# Altium PCB M2_NEO-M9N_MODULE.PcbDoc
Units mil, origin at the board's own origin, x right, y up, seen from the top; angles counter-clockwise.
Board outline 866.14 x 1653.54 mil, 4 copper layers (L01-Top Layer, L02-Inner Layer, L03-Inner Layer, L04-Bottom Layer), stack 29.565 mil thick; 40 components, 31 nets, 161 pads, 305 vias.
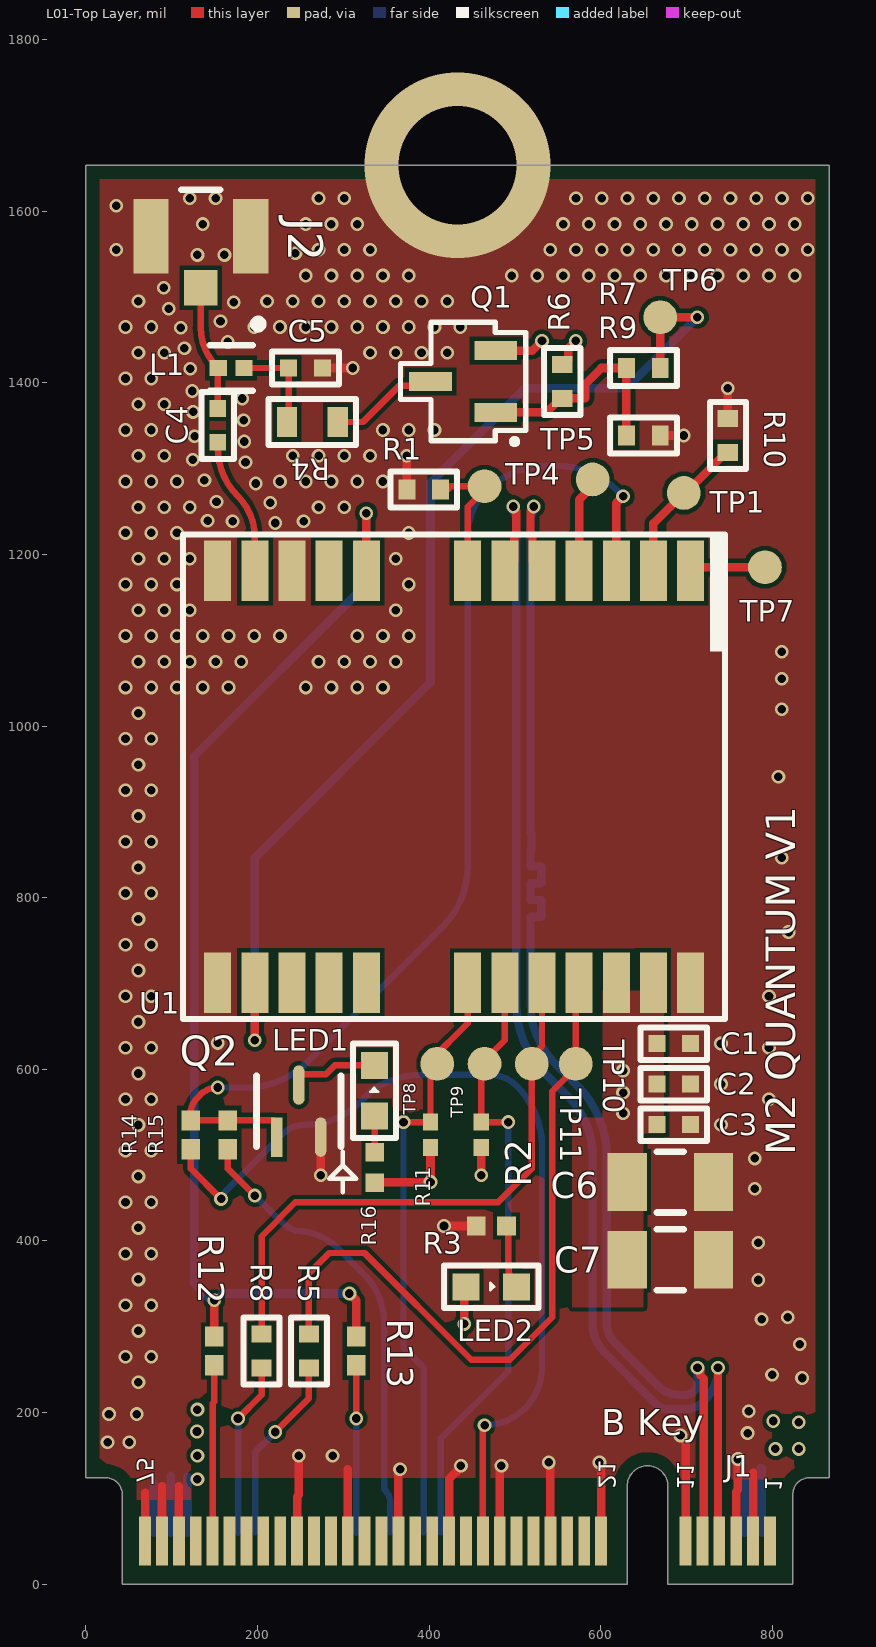
[diagram p0: L01-Top Layer view]
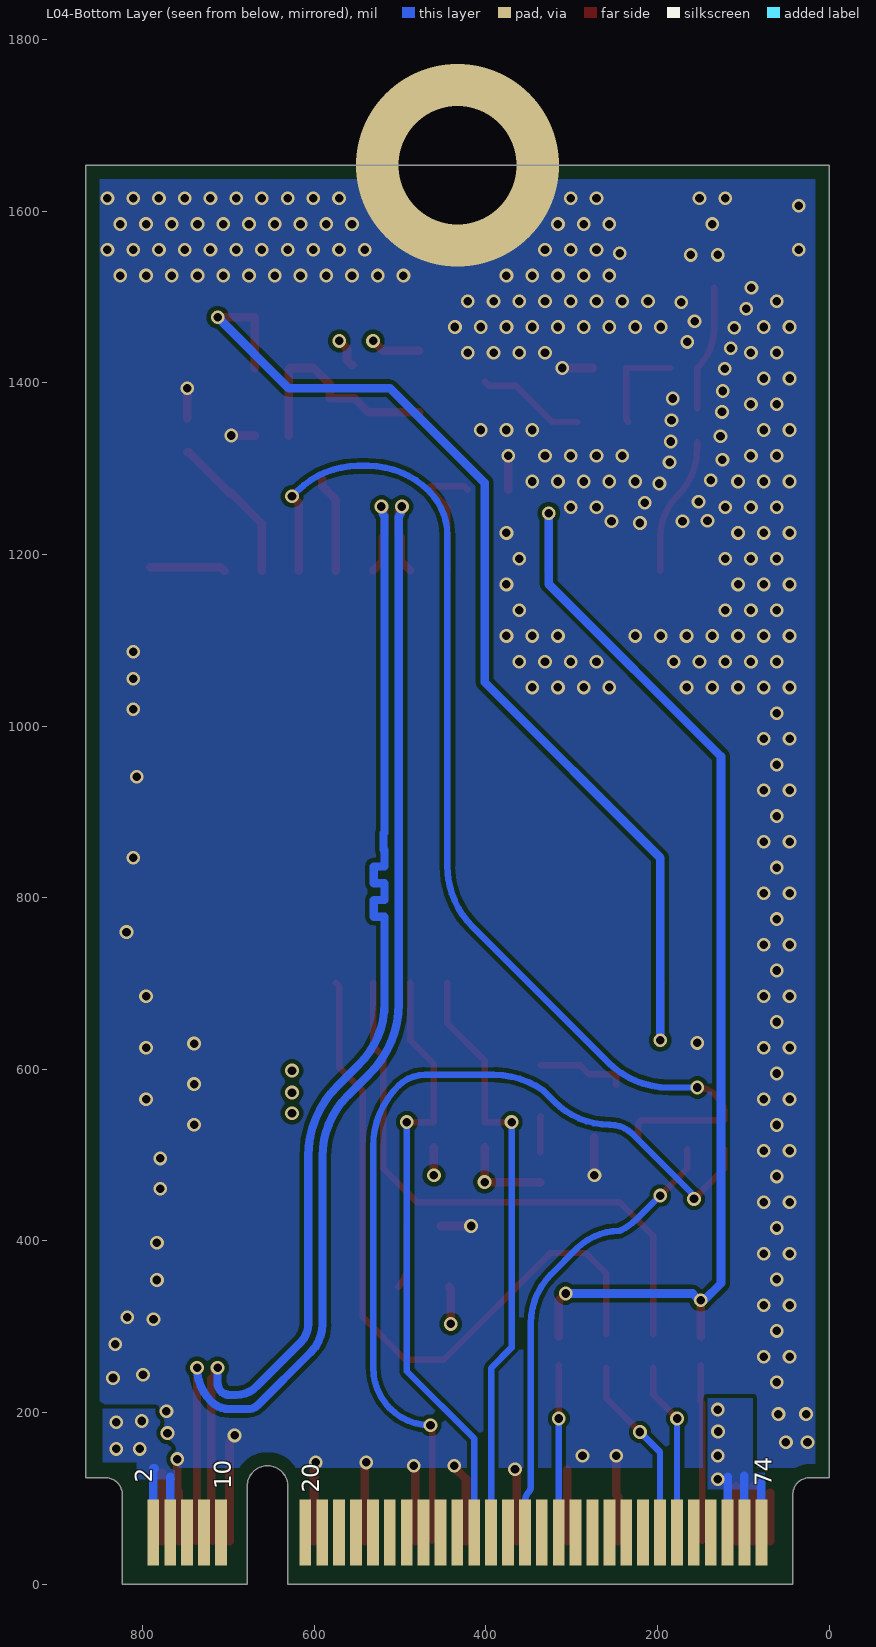
[diagram p1: L04-Bottom Layer view, seen from below]
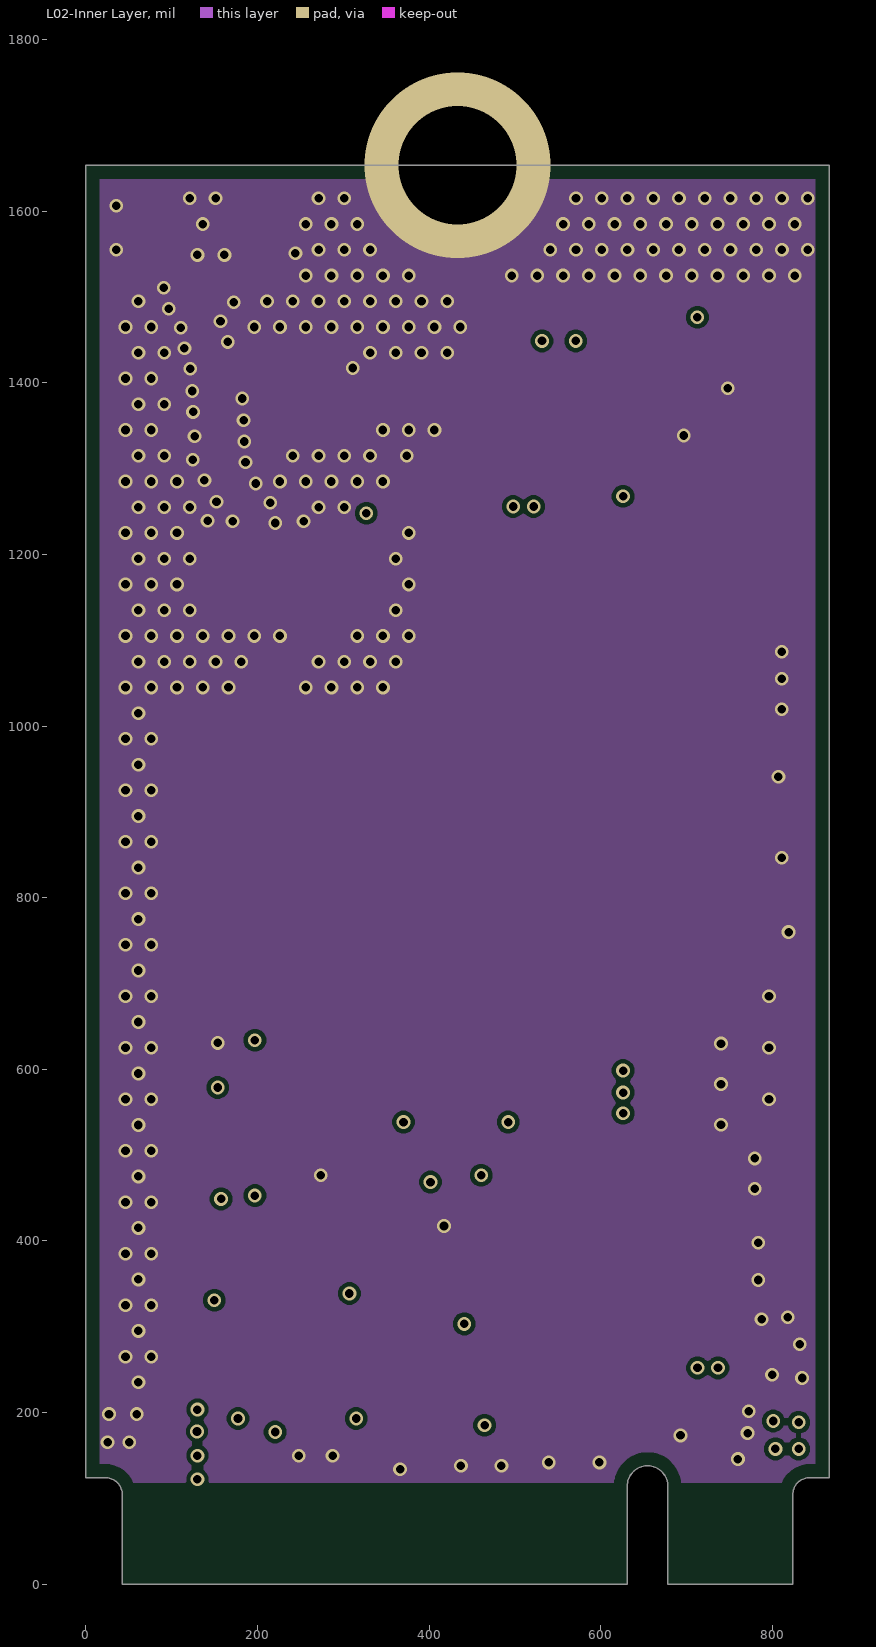
[diagram p2: L02-Inner Layer]
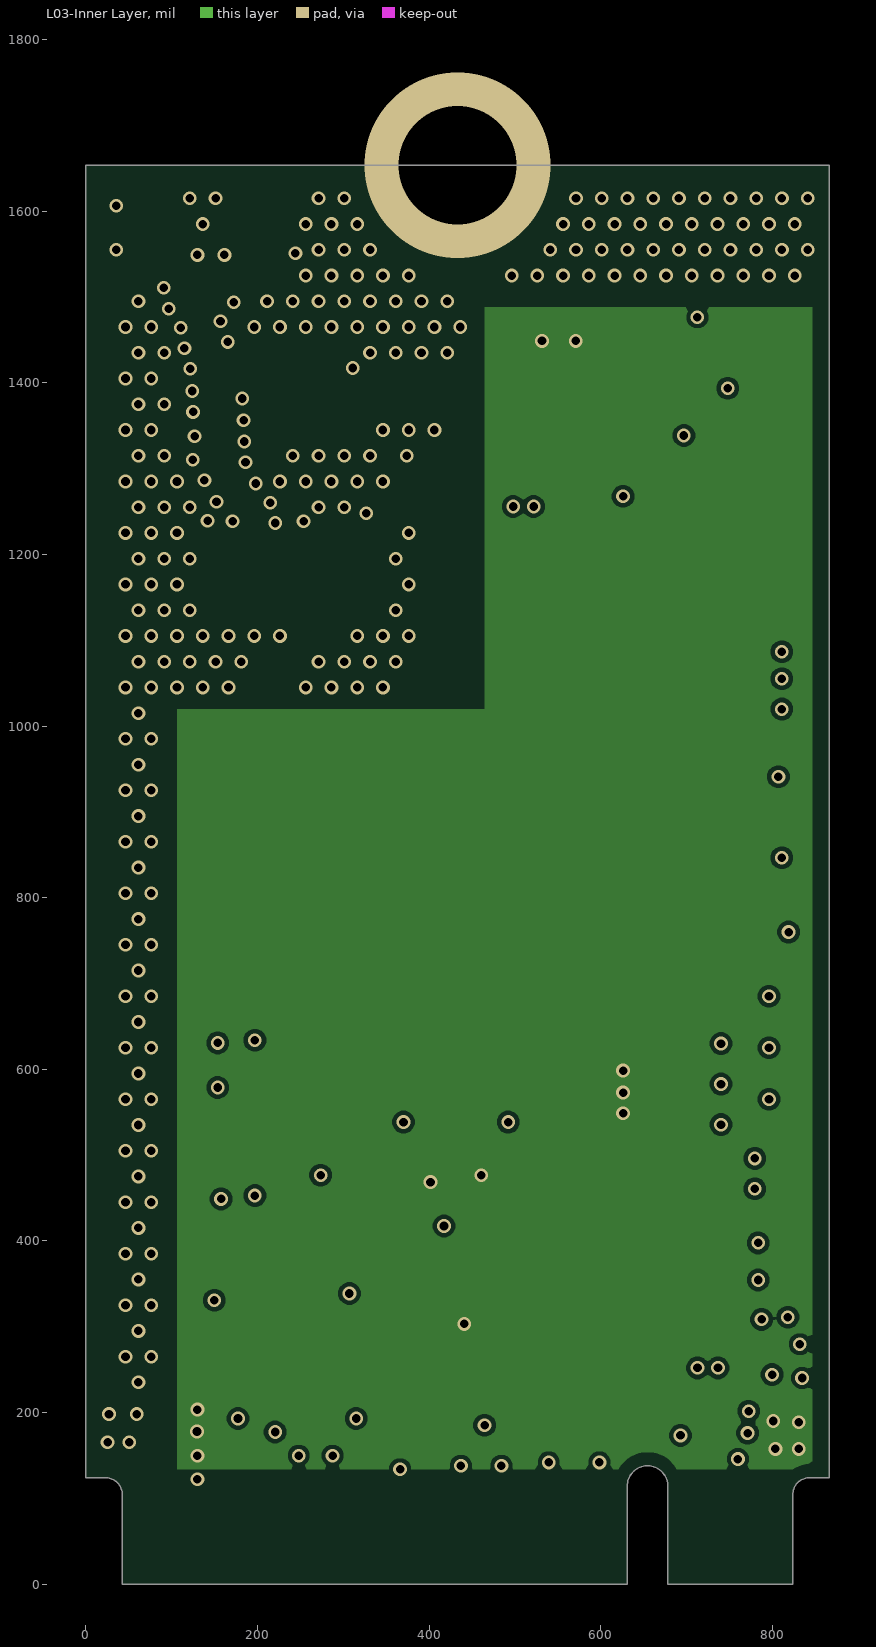
[diagram p3: L03-Inner Layer]
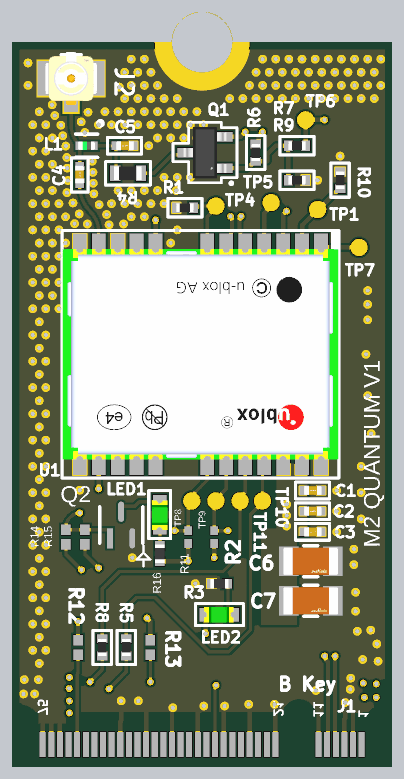
[diagram p4: 3D render of the assembled board from above, using the file's embedded part models]

## Layer stack, top to bottom
Top Solder: solder mask 0.6, Solder Resist, Dk 3.9
L01-Top Layer: signal copper 1.378
Dielectric 1: prepreg 4.3307, 2116, Dk 3.7
L02-Inner Layer: signal copper 1.2
Dielectric 2: core 15.748, FR4, Dk 4.04
L03-Inner Layer: signal copper 1.2
Dielectric 3: prepreg 4.3307, 2116, Dk 3.7
L04-Bottom Layer: signal copper 1.378
Bottom Solder: solder mask 0.6, Solder Resist, Dk 3.9

## Board outline
42.32,0 42.32,104.33 ccw(c22.64,104.33) 22.64,124.02 0,124.02 0,1653.54 866.14,1653.54 866.14,124.02 843.5,124.02 ccw(c843.5,104.33) 823.82,104.33 823.82,0 678.15,0 678.15,114.17 ccw(c654.53,114.17) 630.91,114.17 630.91,0

## Design rules (kind name [scope] priority, off if disabled: settings)
AcuteAngle [All] p1: minimum=6.00000000000000E+0001 checktracksonly=FALSE
BoardOutlineClearance [All] p1: gap=15.75 ignorepadtopadclearanceinfootprint=FALSE
Clearance Clearance_L1andL4_Copper [(InPolygon AND (OnLayer('Top Layer') OR OnLayer('Bottom Layer'))) vs (InDifferentialPairClass('All Differential Pairs'))] p1: gap=5 ignorepadtopadclearanceinfootprint=FALSE
Clearance [All] p2: gap=5 ignorepadtopadclearanceinfootprint=FALSE
ComponentClearance [All] p1: gap=15.75 collisioncheckmode=3 verticalgap=19.68 showdistances=FALSE
DiffPairsRouting 90_Ohm_L1andL4 [InDifferentialPairClass('90_Ohm')] p1: maxlimit=7 minlimit=7 mostfreqgap=7 toplayer_minwidth=9.5 toplayer_maxwidth=9.5 toplayer_prefwidth=9.5 midlayer1_minwidth=9.5 midlayer1_maxwidth=9.5 midlayer1_prefwidth=9.5 midlayer2_minwidth=9.5 midlayer2_maxwidth=9.5 midlayer2_prefwidth=9.5 bottomlayer_minwidth=9.5 bottomlayer_maxwidth=9.5 bottomlayer_prefwidth=9.5 maxuncoupledlength=200
DiffPairsRouting 100_Ohm_L1andL4 [InDifferentialPairClass('100_Ohm')] p2: maxlimit=7 minlimit=7 mostfreqgap=7 toplayer_minwidth=8 toplayer_maxwidth=8 toplayer_prefwidth=8 midlayer1_minwidth=8 midlayer1_maxwidth=8 midlayer1_prefwidth=8 midlayer2_minwidth=8 midlayer2_maxwidth=8 midlayer2_prefwidth=8 bottomlayer_minwidth=8 bottomlayer_maxwidth=8 bottomlayer_prefwidth=8 maxuncoupledlength=200
DiffPairsRouting 100_Ohm_Default [All] p3: maxlimit=10 minlimit=9.5 mostfreqgap=10 toplayer_maxgap=9.5 toplayer_prefgap=9.5 toplayer_minwidth=4.5 toplayer_maxwidth=4.5 toplayer_prefwidth=4.5 midlayer1_mingap=10 midlayer1_minwidth=15 midlayer1_maxwidth=15 midlayer1_prefwidth=15 midlayer2_mingap=10 midlayer2_minwidth=15 midlayer2_maxwidth=15 midlayer2_prefwidth=15 bottomlayer_maxgap=9.5 bottomlayer_prefgap=9.5 bottomlayer_minwidth=4.5 bottomlayer_maxwidth=4.5 bottomlayer_prefwidth=4.5 maxuncoupledlength=200
HoleSize [All] p1: absolutevalues=TRUE maxlimit=118.11 minlimit=5.91 maxpercent=80.000 minpercent=20.000
HoleToHoleClearance [All] p1: gap=11.81 allowstackedmicrovias=TRUE
MatchedLengths [InDifferentialPairClass('All Differential Pairs')] p1: tolerance=1 checknetsindiffpair=TRUE checkdiffpairvsdiffpair=FALSE checkxsignals=FALSE checkothers=FALSE
MinimumSolderMaskSliver [All] p1: minsoldermaskwidth=3.94 // 0.076mm for Green Soldermask, 0.1 for other color soldermask
PlaneClearance [All] p1: clearance=10
PolygonConnect [All] p1: connectstyle=Direct reliefconductorwidth=20 reliefentries=4 polygonreliefangle="90 Angle" airgapwidth=10
RoutingCorners [All] p1: cornerstyle=45-Degree minsetback=98.43 maxsetback=98.43
RoutingVias [All] p1: holewidth=10 width=16 viastyle="Through Hole" minholewidth=10 minwidth=16 maxholewidth=11.81 maxwidth=23.62
SilkToSilkClearance [All] p1: silktosilkclearance=3.94
SilkToSolderMaskClearance [IsPad] p1: minsilkscreentomaskgap=5 clearancetoexposedcopper=TRUE
SolderMaskExpansion [All] p1: expansion=1.97 istentingtop=FALSE
UnRoutedNet [All] p1: checkbadconnections=TRUE
Width [All] p1: maxlimit=100 minlimit=6 preferedwidth=7.5
20 further rules are at their usual default settings.

## Classes and differential pairs
differential pair class 90_Ohm: NewDifferentialPair1
component class 02-M2_GoldFingers: C6 C7 J1 R12 R13 R14 R15
component class 01-M2_NEO-M9N_MODULE: C1 C2 C3 C4 C5 J2 L1 LED1 LED2 Q1 Q2 R1 R2 R3 R4 R5 R6 R7 R8 R9 R10 R11 R16 TP1 TP4 TP5 TP6 TP7 TP8 TP9 TP10 TP11 U1

## Components (designator, comment, footprint, x,y, rotation, side; value= is the part's Value field where it differs from the comment)
C1 "1uF 6V3 0402" c0402 685.04,629.92 r180 top
C2 "100nF 10V 0402" c0402 685.04,582.68 r180 top
C3 "10nF 50V 0402" c0402 685.04,535.43 r180 top
C4 "47pF 50V 0402" c0402 153.54,1350.39 r270 top
C5 "10nF 50V 0402" c0402 255.91,1417.32 r180 top
C6 "47uF_6.3V_1206" FP-GRM31C-0_2-e0_3_0_8-IPC_C 681.1,468.5 r0 top
C7 "47uF_6.3V_1206" FP-GRM31C-0_2-e0_3_0_8-IPC_C 681.1,377.95 r0 top
J1 "OCPTAP_M2_FINGERS" "OCPTAP M2 FINGERS" 797.24,50.2 r0 top locked
J2 "U.FL-R-SMT-1(10)" FP-U_FL-R-SMT-1_10-MFG 133.86,1570.87 r180 top
L1 "27nH 350mA 0.46ohm 0402" FP-LQG15HH_02-IPC_C 169.29,1417.32 r180 top
LED1 "Green" led0603 336.16,574.96 r90 top
LED2 "Green" led0603 472.44,346.46 r0 top
Q1 "DMG2302UKQ-7" SOT23 439.57,1401.57 r90 top
Q2 "2N7002W" FP-419AB-01-IPC_C 248.03,551.18 r90 top
R1 "0 ohm 0402" r0402 393.7,1275.59 r180 top
R2 "10K_5%_0402" RESC1005X40X25LL05T10 460.63,523.62 r270 top
R3 "1K_1%_0402" RESC1005X40X25NL05T05 472.44,417.32 r0 top
R4 "10 OHM 1/4W 0603" r0603 263.78,1354.33 r180 top
R5 "0 ohm 0402" r0402 259.84,271.65 r270 top
R6 "DNI 0 ohm 0402" r0402 555.12,1401.57 r90 top
R7 "0 ohm 0402" r0402 649.61,1417.32 r180 top
R8 "0 ohm 0402" r0402 204.72,271.65 r270 top
R9 "DNI 0 ohm 0402" r0402 649.61,1338.58 r0 top
R10 "DNI 0 ohm 0402" r0402 748.03,1338.58 r270 top
R11 "10K_5%_0402" RESC1005X40X25LL05T10 401.57,523.62 r270 top
R12 "0_5%_0402" RESC1005X40X25NL05T10 149.61,271.65 r270 top
R13 "0_5%_0402" RESC1005X40X25NL05T10 314.96,271.65 r270 top
R14 "DNI_0_5%_0402" RESC1005X40X25NL05T10 122.05,523.62 r90 top
R15 "0_5%_0402" RESC1005X40X25NL05T10 165.35,523.62 r90 top
R16 "1K_1%_0402" RESC1005X40X25NL05T05 336.7,485.65 r270 top
TP1 "1MM" TP1MM 696.85,1271.65 r0 top
TP4 "1MM" TP1MM 464.57,1279.53 r0 top
TP5 "1MM" TP1MM 590.55,1287.4 r0 top
TP6 "1MM" TP1MM 669.29,1476.38 r0 top
TP7 "1MM" TP1MM 791.34,1185.04 r0 top
TP8 "1MM" TP1MM 409.45,606.3 r0 top
TP9 "1MM" TP1MM 464.57,606.3 r0 top
TP10 "1MM" TP1MM 570.87,606.3 r90 top
TP11 "1MM" TP1MM 519.68,606.3 r90 top
U1 "NEO-M9N-00B" IC_NEO-M9N 429.13,940.94 r90 top

## Footprints (in the part's own frame and the unit in brackets; to place one, negate y for a bottom-side part, rotate by r counter-clockwise, add the part's x,y. Pads: shape width x height; smd on the part's side, far side on the other; paste and mask are expansions set on the pad)
c0402 [mm]
  rect 0.5x0.5 smd: 1(-0.5,0) 2(0.5,0)
  silkscreen extent -0.99,-0.48 0.99,0.48, body extent -0.55,-0.28 0.5,0.27, height 0.56
FP-419AB-01-IPC_C [mm]
  rect 1.164x0.336 smd paste+0 mask+0: 1(-0.77,0.65)
  rrect100% 1.164x0.336 smd paste+0 mask+0: 2(-0.77,-0.65) 3(0.77,0)
  silkscreen extent -1.05,-1.25 1.05,1.25
FP-GRM31C-0_2-e0_3_0_8-IPC_C [mil]
  rect 45.46x67.17 smd paste+0 mask+0: 1(-50.23,0) 2(50.23,0)
  silkscreen extent -16,-35 16,35, body extent -77,-39 77,39, height 10
FP-LQG15HH_02-IPC_C [mil]
  rect 20.29x18.6 smd paste+0 mask+0: 1(-14.9,0) 2(14.9,0)
  silkscreen extent -36,-56 25,27, body extent -29,-15 29,15, height 10
FP-U_FL-R-SMT-1_10-MFG [mm]
  rect 1x1.05 smd paste-1000 mask+0: 1(0,1.525)
  rect 1.05x2.2 smd paste-1000 mask+0: 2(-1.475,0) 3(1.475,0)
  silkscreen extent -0.58,-1.38 0.58,-1.38, body extent -2.1,-1.48 2.1,2.15, height 0.25
IC_NEO-M9N [mil]
  rect 70.8x31.5 smd paste-99999: 1(240.15,-275.55) 2(240.15,-232.25) 3(240.15,-188.95) 4(240.15,-145.65) 5(240.15,-102.35) 6(240.15,-59.05) 7(240.15,-15.75) 8(240.15,102.35) 9(240.15,145.65) 10(240.15,188.95) 11(240.15,232.25) 12(240.15,275.55) 13(-240.15,275.55) 14(-240.15,232.25) 15(-240.15,188.95) 16(-240.15,145.65) 17(-240.15,102.35) 18(-240.15,-15.75) 19(-240.15,-59.05) 20(-240.15,-102.35) 21(-240.15,-145.65) 22(-240.15,-188.95) 23(-240.15,-232.25) 24(-240.15,-275.55)
  silkscreen extent -282,-316 282,316, body extent -240,-315 240,315, height 91
led0603 [mm]
  rect 0.8x0.8 smd: 1(-0.75,0) 2(0.75,0)
  silkscreen extent -1.4,-0.64 1.4,0.64, body extent -0.88,-0.44 0.82,0.46, height 0.9
"OCPTAP M2 FINGERS" [mm]
  rect 0.35x1.45 smd: 1(0,0) 3(-0.5,0) 5(-1,0) 7(-1.5,0) 9(-2,0) 11(-2.5,0) 21(-5,0) 23(-5.5,0) 25(-6,0) 27(-6.5,0) 29(-7,0) 31(-7.5,0) 33(-8,0) 35(-8.5,0) 37(-9,0) 39(-9.5,0) 41(-10,0) 43(-10.5,0) 45(-11,0) 47(-11.5,0) 49(-12,0) 51(-12.5,0) 53(-13,0) 55(-13.5,0) 57(-14,0) 59(-14.5,0) 61(-15,0) 63(-15.5,0) 65(-16,0) 67(-16.5,0) 69(-17,0) 71(-17.5,0) 73(-18,0) 75(-18.5,0)
  rect 0.35x1.95 smd far side: 2(-0.244,0.25) 4(-0.744,0.25) 6(-1.244,0.25) 8(-1.744,0.25) 10(-2.244,0.25) 20(-4.744,0.25) 22(-5.244,0.25) 24(-5.744,0.25) 26(-6.244,0.25) 28(-6.744,0.25) 30(-7.244,0.25) 32(-7.744,0.25) 34(-8.244,0.25) 36(-8.744,0.25) 38(-9.244,0.25) 40(-9.744,0.25) 42(-10.244,0.25) 44(-10.744,0.25) 46(-11.244,0.25) 48(-11.744,0.25) 50(-12.244,0.25) 52(-12.744,0.25) 54(-13.244,0.25) 56(-13.744,0.25) 58(-14.244,0.25) 60(-14.744,0.25) 62(-15.244,0.25) 64(-15.744,0.25) 66(-16.244,0.25) 68(-16.744,0.25) 70(-17.244,0.25) 72(-17.744,0.25) 74(-18.244,0.25)
r0402 [mm]
  rect 0.5x0.6 smd: 1(-0.5,0) 2(0.5,0)
  silkscreen extent -0.99,-0.53 0.99,0.53, body extent -0.5,-0.25 0.5,0.25, height 0.36
r0603 [mm]
  rect 0.6x0.9 smd: 1(-0.75,0) 2(0.75,0)
  silkscreen extent -1.3,-0.69 1.3,0.69, body extent -0.79,-0.4 0.81,0.4, height 0.46
RESC1005X40X25LL05T10 [mm] "Chip Resistor, 2-Leads, Body 1.00x0.50mm, IPC High Density"
  rect 0.5x0.45 smd: 1(-0.375,0) 2(0.375,0)
  body extent -0.53,-0.27 0.53,0.28, height 0.4
RESC1005X40X25NL05T05 [mm] "Chip Resistor, 2-Leads, Body 1.05x0.55mm, IPC Medium Density"
  rect 0.55x0.55 smd: 1(-0.45,0) 2(0.45,0)
  body extent -0.53,-0.28 0.53,0.28, height 0.4
RESC1005X40X25NL05T10 [mm] "Chip Resistor, 2-Leads, Body 1.00x0.50mm, IPC Medium Density"
  rect 0.6x0.55 smd: 1(-0.425,0) 2(0.425,0)
  body extent -0.53,-0.27 0.53,0.28, height 0.4
SOT23 [mil]
  rect 22x50 smd: 1(-36.02,-38) 2(36.02,-38) 3(0,38)
  silkscreen extent -73,-73 69,73, body extent -59,-49 59,49, height 43
TP1MM [mm] "Test Point 1MM diameter"
  round 1 smd paste-100: 1(0,0)

## Part data
C1: library part "CAP CER 1UF 6.3V X7R 0402", "0402 1 uF 6.3 V ±10% Tolerance X7R Multilayer Ceramic Capacitor", Capacitance=1uF, Case Code (Imperial)=0402, Case Code (Metric)=1005, Dielectric=X7R, Manufacturer=Murata, Manufacturer Part Number=GRM155R70J105KA12J, Max Operating Temperature=125°C, Min Operating Temperature=-55°C, Package Quantity=50000, Supplier Part Number 1=490-13339-1-ND, Tolerance=10%, Voltage Rating=6.3V, Case/Package=0402, CATEGORY="Ceramic Capacitors", ComponentLink1Description=http://www.mouser.com/ds/2/281/c02e-2905.pdf?src-supplier=Mouser, ComponentLink1URL=http://www.mouser.com/ds/2/281/c02e-2905.pdf?src-supplier=Mouser, ComponentLink2Description=http://search.murata.co.jp/Ceramy/image/img/A01X/G101/ENG/GRM155R70J105KA12-01.pdf?src-supplier=Digi-Key, ComponentLink2URL=http://search.murata.co.jp/Ceramy/image/img/A01X/G101/ENG/GRM155R70J105KA12-01.pdf?src-supplier=Digi-Key, Length=0.039inch, Mount="Surface Mount", Packaging="Tape and Reel", Pricing 1="1=0.10000, 10=0.07300, 50=0.04000, 100=0.03270, 500=0.02334, 1000=0.01833, 2500=0.01666, 5000=0.01533 (USD)", RoHS=Yes, RoHS Compliant=Yes, Stock 1=7275801, Supplier 1=Digi-Key, Termination=SMD/SMT, Thickness=0.022inch, Voltage Rating (DC)=6.3V, Weight=0.000212oz, Width=0.02inch
C2: library part "CAP CER 0.1UF 10V X7R 0402", "CL05 Series 0.1 uF 10 V ±10 % Tolerance X7R SMT Multilayer Ceramic Capacitor", Capacitance=100nF, Case Code (Imperial)=0402, Case Code (Metric)=1005, Dielectric=X7R, Manufacturer=Samsung, Manufacturer Part Number=CL05B104KP5NNNC, Max Operating Temperature=125°C, Min Operating Temperature=-55°C, Package Quantity=1, Supplier Part Number 1=1276-1002-1-ND, Tolerance=10%, Voltage Rating=10V, Case/Package=0402, CATEGORY="Ceramic Capacitors", ComponentLink1Description=https://datasheet.ciiva.com/15165/getdatasheetpartid-37100-15165107.pdf?src-supplier=Verical, ComponentLink1URL=https://datasheet.ciiva.com/15165/getdatasheetpartid-37100-15165107.pdf?src-supplier=Verical, ComponentLink2Description=https://datasheet.ciiva.com/16498/cl05b104kq5nnnc-16498491.pdf?src-supplier=Future+Electronics, ComponentLink2URL=https://datasheet.ciiva.com/16498/cl05b104kq5nnnc-16498491.pdf?src-supplier=Future+Electronics, Construction=Flat, Contact Plating=Tin, Depth=0.5mm, Height=0.5mm, Length=1mm, Mount="Surface Mount", Packaging="Tape and Reel", Pricing 1="1=0.10000, 10=0.02400, 50=0.01300, 100=0.01050, 500=0.00752, 1000=0.00592, 2500=0.00538, 5000=0.00495 (USD)", Radiation Hardening=No, RoHS=Yes, RoHS Compliant=Yes, Series=CL, Stock 1=36338332, Supplier 1=Digi-Key, Thickness=0.022inch, Width=0.02inch
C3 C5: library part "CAP CER 10000PF 50V X7R 0402", "CAP CER 10000PF 50V X7R 0402", Capacitance=10nF, Case Code (Imperial)=0402, Case Code (Metric)=1005, Dielectric=X7R, Manufacturer=Murata, Manufacturer Part Number=GCM155R71H103KA55D, Max Operating Temperature=125°C, Min Operating Temperature=-55°C, Package Quantity=1, Ratings=AEC-Q200, Supplier Part Number 1=490-4762-1-ND, Tolerance=10%, Voltage=50V, Case/Package=0402, CATEGORY="Ceramic Capacitors", ComponentLink1Description=https://datasheet.ciiva.com/130/product-130683.pdf?src-supplier=Digi-Key, ComponentLink1URL=https://datasheet.ciiva.com/130/product-130683.pdf?src-supplier=Digi-Key, ComponentLink2Description=https://datasheet.ciiva.com/130/product-130682.pdf?src-supplier=Digi-Key, ComponentLink2URL=https://datasheet.ciiva.com/130/product-130682.pdf?src-supplier=Digi-Key, ComponentLink3Description=https://datasheet.ciiva.com/130/product-130684.pdf?src-supplier=Digi-Key, ComponentLink3URL=https://datasheet.ciiva.com/130/product-130684.pdf?src-supplier=Digi-Key, ComponentLink4Description=https://datasheet.ciiva.com/11787/0900766b80ef92d0-11787082.pdf?src-supplier=RSComponents, ComponentLink4URL=https://datasheet.ciiva.com/11787/0900766b80ef92d0-11787082.pdf?src-supplier=RSComponents, ComponentLink5Description=https://datasheet.ciiva.com/16199/product-16199584.pdf?src-supplier=Future+Electronics, ComponentLink5URL=https://datasheet.ciiva.com/16199/product-16199584.pdf?src-supplier=Future+Electronics, ComponentLink6Description=https://datasheet.ciiva.com/18100/getdatasheetpartid-27433-18100656.pdf?src-supplier=Verical, ComponentLink6URL=https://datasheet.ciiva.com/18100/getdatasheetpartid-27433-18100656.pdf?src-supplier=Verical, ComponentLink7Description=https://datasheet.ciiva.com/2989/product-2989235.pdf?src-supplier=Avnet, ComponentLink7URL=https://datasheet.ciiva.com/2989/product-2989235.pdf?src-supplier=Avnet, Construction=Flat, Depth=0.5mm, Height=0.5mm, Lead Free="Lead Free", Length=1mm, Mount="Surface Mount", Packaging="Tape and Reel", Pricing 1="1=0.10000, 10=0.02700, 50=0.01460, 100=0.01190, 500=0.00848, 1000=0.00667, 2500=0.00606, 5000=0.00558 (USD)", Radiation Hardening=No, REACH SVHC="No SVHC", RoHS=Yes, RoHS Compliant=Yes, Series=GCM, Stock 1=16109194, Supplier 1=Digi-Key, Termination=SMD/SMT, Thickness=0.022inch, Voltage Rating=50V, Voltage Rating (DC)=50V, Width=0.02inch
C4: library part "CAP CER 47PF 50V C0G/NPO 0402", "0402 47 pF 50 V ±5 % Tolerance NP0 SMT Multilayer Ceramic Capacitor", Capacitance=47pF, Case Code (Imperial)=0402, Case Code (Metric)=1005, Dielectric=C0G, Dielectric Material=Ceramic, Insulation Resistance=100GR, Manufacturer=Yageo, Manufacturer Part Number=CC0402JRNPO9BN470, Max Operating Temperature=125°C, Min Operating Temperature=-55°C, Package Quantity=1, Supplier Part Number 1=311-1021-1-ND, Tolerance=5%, Voltage=50V, Case/Package=0402, CATEGORY="Ceramic Capacitors", ComponentLink1Description=https://datasheet.ciiva.com/28450/1443161-28450267.pdf?src-supplier=Element14, ComponentLink1URL=https://datasheet.ciiva.com/28450/1443161-28450267.pdf?src-supplier=Element14, ComponentLink2Description=https://datasheet.ciiva.com/8033/1443161-8033638.pdf?src-supplier=Element14, ComponentLink2URL=https://datasheet.ciiva.com/8033/1443161-8033638.pdf?src-supplier=Element14, ComponentLink3Description=https://datasheet.ciiva.com/8033/1443161-8033637.pdf?src-supplier=Element14, ComponentLink3URL=https://datasheet.ciiva.com/8033/1443161-8033637.pdf?src-supplier=Element14, ComponentLink4Description=https://datasheet.ciiva.com/161/mlccorderingcode-161493.pdf?src-supplier=Digi-Key, ComponentLink4URL=https://datasheet.ciiva.com/161/mlccorderingcode-161493.pdf?src-supplier=Digi-Key, ComponentLink5Description=https://datasheet.ciiva.com/161/mlccorderingcode-161492.pdf?src-supplier=Digi-Key, ComponentLink5URL=https://datasheet.ciiva.com/161/mlccorderingcode-161492.pdf?src-supplier=Digi-Key, ComponentLink6Description=https://datasheet.ciiva.com/161/mlccorderingcode-161494.pdf?src-supplier=Digi-Key, ComponentLink6URL=https://datasheet.ciiva.com/161/mlccorderingcode-161494.pdf?src-supplier=Digi-Key, Depth=0.5mm, Height=0.5mm, Lead Free="Lead Free", Length=1mm, Mount="Surface Mount", Number of Pins=2, Packaging="Tape and Reel", Pricing 1="1=0.10000, 10=0.01800, 50=0.01000, 100=0.00820, 500=0.00584, 1000=0.00458, 2500=0.00417, 5000=0.00383 (USD)", Radiation Hardening=No, REACH SVHC="No SVHC", Resistor Type=Ceramic, RoHS=Yes, RoHS Compliant=Yes, Series=CC, Stock 1=4278982, Supplier 1=Digi-Key, Termination=SMD/SMT, Thickness=0.022inch, Voltage Rating=50V, Voltage Rating (DC)=50V, Weight=2.3E-05oz, Width=0.02inch
C6 C7: library part CMP-2000-06344-2, "Chip Multilayer Ceramic Capacitors for General Purpose, 1206, 47uF, X5R, 15%, 20%, 6.3V", Capacitance=47uF, Case Code (Imperial)=1206, Case Code (Metric)=3216, Dielectric=X5R, Max Operating Temperature=85°C, Min Operating Temperature=-55°C, Package Quantity=2000, Tolerance=20%, Voltage=6.3V, Case/Package=1206, Depth=1.6mm, Height=1.6mm, Lead Free="Lead Free", Length=3.2mm, Material=Ceramic, Mount="Surface Mount", Packaging="Tape and Reel", Radiation Hardening=No, REACH SVHC="No SVHC", Termination=SMD/SMT, Thickness=0.071inch, Voltage Rating=6.3V, Voltage Rating (DC)=6.3V, Width=0.063inch
J2: library part CMP-2000-05152-3, "CONN U.FL RCPT STR 50 OHM SMD", Dielectric Material=Polymer, Frequency=6GHz, Housing Color=Beige, Insulation Resistance=500MR, Max Operating Temperature=90°C, Min Operating Temperature=-40°C, Package Quantity=2500, Body Material=Bronze, Body Plating=Silver, Connector Type=Coaxial, Contact Material=Brass, Contact Plating=Gold, Depth=3.1mm, Fastening Type=Snap, Gender=Male, Impedance=50R, Lead Free="Lead Free", Length=3mm, Max Frequency=6GHz, Mount="Surface Mount", Orientation=Straight, Packaging="Cut Tape", Radiation Hardening=No, REACH SVHC="No SVHC", Series=U.FL, Termination=Solder, Weight=0.001764oz, Wire/Cable Type=Coaxial
L1: library part CMP-2000-06578-2, "Multilayer type RF Inductor 27nH ±5% 0.46Ω 350mA 0402", Case Code (Imperial)=0402, Case Code (Metric)=1005, Current Rating=300mA, DC Resistance (DCR)=460mR, Inductance=27nH, Inductance Tolerance=5%, Manufacturer Part Number=LQG15HS27NJ02D, Max Operating Temperature=125°C, Min Operating Temperature=-55°C, Package Quantity=10000, Self Resonant Frequency=1.7GHz, Test Frequency=100MHz, Case/Package=0402, Core Material=Air, DC Current=300mA, Depth=0.55mm, Height=0.5mm, Height - Seated (Max)=0.022inch, Lead Free="Lead Free", Length=1mm, Max DC Current=300mA, Military Standard=Not, Mount="Surface Mount", Packaging="Tape and Reel", Q Factor=8, REACH SVHC="No SVHC", Shielding=Unshielded, Termination=SMD/SMT, Tolerance=5%, Width=0.02inch
LED1 LED2: library part "LED GREEN CLEAR CHIP SMD", "LED High-Power Uni-Color Green 574nm 2-Pin Chip LED T/R", Case Code (Imperial)=0603, Case Code (Metric)=1608, Forward Current=30mA, Forward Voltage=2V, Lens Color=Colorless, Manufacturer="Vishay Lite-On", Manufacturer Part Number=LTST-C190KGKT, Max Operating Temperature=85°C, Min Operating Temperature=-55°C, Package Quantity=1, Power Dissipation=75mW, Reverse Voltage=5V, Supplier Part Number 1=160-1435-1-ND, Test Current=20mA, Case/Package=0603, CATEGORY=LEDs, Color=Green, ComponentLink1Description=https://datasheet.ciiva.com/11774/0900766b80dc02a8-11774060.pdf?src-supplier=RSComponents, ComponentLink1URL=https://datasheet.ciiva.com/11774/0900766b80dc02a8-11774060.pdf?src-supplier=RSComponents, ComponentLink2Description=https://datasheet.ciiva.com/12403/100-ltst-c190kgkt-63268-12403899.pdf?src-supplier=Mouser, ComponentLink2URL=https://datasheet.ciiva.com/12403/100-ltst-c190kgkt-63268-12403899.pdf?src-supplier=Mouser, ComponentLink3Description=https://datasheet.ciiva.com/15117/getdatasheetpartid-141494-15117731.pdf?src-supplier=Verical, ComponentLink3URL=https://datasheet.ciiva.com/15117/getdatasheetpartid-141494-15117731.pdf?src-supplier=Verical, ComponentLink4Description=https://datasheet.ciiva.com/2109/s-110-ltst-c190kgkt-2109989.pdf?src-supplier=Digi-Key, ComponentLink4URL=https://datasheet.ciiva.com/2109/s-110-ltst-c190kgkt-2109989.pdf?src-supplier=Digi-Key, ComponentLink5Description=https://datasheet.ciiva.com/2109/s-110-ltst-c190kgkt-2109988.pdf?src-supplier=Digi-Key, ComponentLink5URL=https://datasheet.ciiva.com/2109/s-110-ltst-c190kgkt-2109988.pdf?src-supplier=Digi-Key, ComponentLink6Description=https://datasheet.ciiva.com/2109/s-110-ltst-c190kgkt-2109990.pdf?src-supplier=Digi-Key, ComponentLink6URL=https://datasheet.ciiva.com/2109/s-110-ltst-c190kgkt-2109990.pdf?src-supplier=Digi-Key, Depth=0.8mm, Dominant Wavelength=571nm, Height=0.8mm, Illumination Color=Green, Lead Free="Lead Free", Length=1.6mm, Lens Style=Diffused,Colorless,Rectangular,Clear, Lens Transparency=Clear, Luminous Intensity=35mcd, Mount="Surface Mount", Number of Elements=1, Number of LEDs=1, Number of Pins=2, Packaging="Tape and Reel", Power Rating=75mW, Pricing 1="1=0.24000, 10=0.13200, 100=0.06110, 500=0.05640, 1000=0.04418, 2000=0.04324 (USD)", Radiation Hardening=No, RoHS=Yes, RoHS Compliant=Yes, Stock 1=1803324, Supplier 1=Digi-Key, Viewing Angle=130°, Wavelength=574nm, Width=0.8mm
Q1: "N-Channel 20 V 2.8A (Ta) 660mW (Ta) Surface Mount SOT-23-3", Case/Package=SOT-23, Continuous Drain Current (ID)=2.8A, Drain to Source Voltage (Vdss)=20V, Input Capacitance=130pF, Manufacturer=Diodes, Max Operating Temperature=150°C, Max Power Dissipation=660mW, Mfr_Name="Diodes Inc", Min Operating Temperature=-55°C, Supplier Part Number 1=31-DMG2302UKQ-7CT-ND, Copyright="Copyright (C) 2022 Ultra Librarian. All rights reserved.", Digi-Key_Part_Number_1=31-DMG2302UKQ-7TR-ND, Digi-Key_Part_Number_2=31-DMG2302UKQ-7CT-ND, Digi-Key_Part_Number_3=31-DMG2302UKQ-7DKR-ND, Manufacturer Part Number=DMG2302UKQ-7, Manufacturer_Part_Number=DMG2302UKQ-7, Mount="Surface Mount", Packaging="Tape and Reel", Pricing 1="1=0.48000, 10=0.36000, 100=0.22400, 500=0.15330, 1000=0.11792 (USD)", Rds On Max=90mR, RefDes=RefDes, RoHS=Yes, Stock 1=997695, Supplier 1=Digi-Key, Type=DEV
Q2: library part CMP-07173-000098-1, "MOSFET N-CH 60V 115MA SOT-323", Case/Package=SOT-323, Continuous Drain Current (ID)=115mA, Drain to Source Breakdown Voltage=60V, Drain to Source Resistance=7.5R, Gate to Source Voltage (Vgs)=20V, Input Capacitance=50pF, Max Operating Temperature=150°C, Max Power Dissipation=200mW, Min Operating Temperature=-55°C, Package Quantity=1, Threshold Voltage=1.76V, Contact Plating=Tin, Drain to Source Voltage (Vdss)=60V, Element Configuration=Single, Height=1mm, Lead Free="Lead Free", Length=2mm, Mount="Surface Mount", Number of Elements=1, Number of Pins=3, On-State Resistance=7.5R, Packaging="Tape and Reel", Power Dissipation=200mW, Radiation Hardening=No, Rds On Max=7.5R, REACH SVHC="No SVHC", Turn-Off Delay Time=12.5ns, Turn-On Delay Time=5.85ns, Weight=0.03g, Width=1.25mm
R1 R5 R6 R7 R8 R9 R10: library part "RES 0 OHM JUMPER 1/16W 0402", "RES SMD 0 OHM JUMPER 1/16W 0402", Case Code (Imperial)=0402, Case Code (Metric)=1005, Manufacturer=Yageo, Manufacturer Part Number=RC0402JR-070RL, Max Operating Temperature=155°C, Max Power Dissipation=63mW, Min Operating Temperature=-55°C, Package Quantity=1, Power Rating=62.5mW, Resistance=0mR, Resistance Tolerance=5%, Resistor Type="Thick Film", Supplier Part Number 1=311-0.0JRCT-ND, Temperature Coefficient=200ppm/°C, Voltage Rating=50V, Case/Package=0402, CATEGORY="Chip SMD Resistors", ComponentLink1Description=https://datasheet.ciiva.com/2452/pyu-rc0402-51-rohs-l-6-2452608.pdf?src-supplier=Digi-Key, ComponentLink1URL=https://datasheet.ciiva.com/2452/pyu-rc0402-51-rohs-l-6-2452608.pdf?src-supplier=Digi-Key, ComponentLink2Description=https://datasheet.ciiva.com/11808/0900766b80c66297-11808195.pdf?src-supplier=RSComponents, ComponentLink2URL=https://datasheet.ciiva.com/11808/0900766b80c66297-11808195.pdf?src-supplier=RSComponents, ComponentLink3Description=https://datasheet.ciiva.com/7983/1018594-7983535.pdf?src-supplier=Element14, ComponentLink3URL=https://datasheet.ciiva.com/7983/1018594-7983535.pdf?src-supplier=Element14, ComponentLink4Description=https://datasheet.ciiva.com/22747/1018594-22747515.pdf?src-supplier=Element14, ComponentLink4URL=https://datasheet.ciiva.com/22747/1018594-22747515.pdf?src-supplier=Element14, ComponentLink5Description=https://datasheet.ciiva.com/2452/pyu-r-int-thick-7-2452609.pdf?src-supplier=Digi-Key, ComponentLink5URL=https://datasheet.ciiva.com/2452/pyu-r-int-thick-7-2452609.pdf?src-supplier=Digi-Key, ComponentLink6Description=https://datasheet.ciiva.com/2452/pyu-r-int-thick-7-2452610.pdf?src-supplier=Digi-Key, ComponentLink6URL=https://datasheet.ciiva.com/2452/pyu-r-int-thick-7-2452610.pdf?src-supplier=Digi-Key, ComponentLink7Description=https://datasheet.ciiva.com/8896/pyu-rc0402-51-rohs-l-6-8896201.pdf?src-supplier=Avnet, ComponentLink7URL=https://datasheet.ciiva.com/8896/pyu-rc0402-51-rohs-l-6-8896201.pdf?src-supplier=Avnet, ComponentLink8Description=https://datasheet.ciiva.com/15189/getdatasheetpartid-326379-15189533.pdf?src-supplier=Verical, ComponentLink8URL=https://datasheet.ciiva.com/15189/getdatasheetpartid-326379-15189533.pdf?src-supplier=Verical, Construction=Rectangular, Contact Plating=Tin,Matte, Depth=0.5mm, Features="Moisture Resistant", Height=0.016inch, Lead Free="Lead Free", Length=1mm, Military Standard=Not, Number of Terminations=2, Packaging="Tape and Reel", Pricing 1="1=0.10000, 10=0.01200, 25=0.00840, 50=0.00640, 100=0.00480, 250=0.00364, 500=0.00290, 1000=0.00214, 5000=0.00154 (USD)", Radiation Hardening=No, REACH SVHC=Unknown, RoHS=Yes, RoHS Compliant=Yes, Series=RC, Size Code=0402, Stock 1=45165868, Supplier 1=Digi-Key, Technology="THICK FILM", Termination=SMD/SMT, Tolerance=5%, Width=0.02inch
R2 R11: library part CMP-2002-07353-1, Manufacturer="Yageo / Phycomp", Part Number=RC0402FR-0710KL
R3 R16: library part CMP-1011-00510-4, "Chip Resistor, 1 KOhm, +/- 1%, 100 mW, -55 to 155 degC, 0402 (1005 Metric), RoHS, Tape and Reel", Case Code (Imperial)=0402, Case Code (Metric)=1005, Manufacturer="Basic Passives", Max Operating Temperature="155 degC", Min Operating Temperature="-55 degC", Package Quantity=10000, PartNumber=ERJ-2RKF1001X, Power Rating="100 mW", Resistance="1 KOhm", Tolerance=1%, Voltage Rating="50 V", Case\/Package=0402, ComponentLink1Description="Manufacturer URL", ComponentLink1URL=http://www.panasonic.com/, ComponentLink2Description=Datasheet, ComponentLink2URL=http://industrial.panasonic.com/cdbs/www-data/pdf/RDA0000/AOA0000C86.pdf, DatasheetVersion=04/2015, Height="0.35 mm", Length="1 mm", Mount="Surface Mount", Mounting Technology="Surface Mount", PackageDescription="2-Pin Surface Mount Device, Body 1 x 0.5 mm", PackageReference=0402, Packaging="Tape and Reel", Pins=2, Radiation Hardening=No, REACH SVHC=Yes, RoHSCompliant=true, Width="0.5 mm"
R4: library part "RES SMD 10 OHM 1% 1/4W 0603", "Res Surge Chip Thick Film 0603 10 Ohm 1% 1/4W ±200ppm/°C Molded Paper T/R", Manufacturer=Yageo, Manufacturer Part Number=SR0603FR-7T10RL, Supplier Part Number 1=YAG5824CT-ND, CATEGORY="Chip SMD Resistors", ComponentLink1Description=http://www.yageo.com/documents/recent/PYu-SR_D_F%20tol_RoHS_L_3.pdf?src-supplier=Digi-Key, ComponentLink1URL=http://www.yageo.com/documents/recent/PYu-SR_D_F%20tol_RoHS_L_3.pdf?src-supplier=Digi-Key, Pricing 1="1=0.75000, 10=0.55100, 100=0.32080, 1000=0.17992, 2500=0.17370 (USD)", RoHS=Yes, RoHS Compliant=Yes, Stock 1=13323, Supplier 1=Digi-Key
R12 R13 R14 R15: library part CMP-2002-06457-1, Manufacturer=Panasonic, Part Number=ERJ-U020R00X
TP1 TP4 TP5 TP6 TP7 TP8 TP9 TP10 TP11: library part TP_1MM, "Test Point 1MM diameter"
U1: library part "IC NEO-M9N-00B", "GNSS module, Flash, TCXO, SAW, LNA, LCC, 12x16 mm Professional Grade", Manufacturer=u-blox, Supplier Part Number 1=672-NEO-M9N-00BCT-ND, CATEGORY="RF Receivers, Transceivers", Manufacturer Part Number=NEO-M9N-00B, Pricing 1="1=27.00000, 10=23.92000, 50=19.61000, 100=15.68010 (USD)", RoHS=Yes, RoHS Compliant=Yes, Stock 1=250, Supplier 1=Digi-Key

## Via types
v1: diameter 16, hole 10, L01-Top Layer to L04-Bottom Layer, 304 vias
v2: diameter 216.54/216.54/216.54/236.22 (per signal layer), hole 137.8, L01-Top Layer to L04-Bottom Layer, 1 vias

## Nets (pads, with @x,y where several pads share a name; then routed paths per layer and width w, separated by ;. In a path a pad name is that pad's centre, name@x,y a point inside that pad or via, vN(x,y) a via of type N, cw(c..) or ccw(c..) an arc to the next point about the centre after c; other vN are vias at no path point)
+3V3: C1.2 C2.2 C3.2 C6.1 C7.1 J1.2 J1.4 J1.70 J1.72 J1.74 LED2.1 Q1.2 R2.2 R6.2 R11.2 R16.2 U1.22 U1.23 | length 606
  L01-Top Layer w10: R16.2 336.99,468.22 401.29,468.22 v1(401.57,468.5) R11.2 ; v1(440.94,303.15) 440.94,341.7 cw(c447.67,341.7) LED2.1 ; v1(460.63,476.38) R2.2 ; Q1.2 520.28,1437.6 v1(531.5,1448.82) ; R6.2 557.09,1421.26 561.93,1426.1 561.93,1439.88 v1(570.87,1448.82)
  L04-Bottom Layer w10: J1.74 78.98,118.11 ; J1.72 98.66,126.09 ; J1.70 118.35,125.2 ; J1.4 767.95,125.15 ; 786.21,134.64 787.64,134.64 J1.2
  other v1: 129.92,122.05 129.92,149.61 803.6,157.48 830.71,157.48 129.45,177.82 830.71,188.47 801.01,189.98 129.92,203.33 625.98,548.72 625.98,572.83 625.98,598.43
D_SEL: R10.2 TP1.1 U1.2 | length 176
  L01-Top Layer w10: U1.2 661.38,1236.19 TP1.1 698.82,1271.65 746.06,1318.9 R10.2
EXTIN: TP5.1 U1.4 | length 112.8
  L01-Top Layer w10: U1.4 574.8,1263.71 590.55,1279.45 TP5.1
GND: C1.1 C2.1 C3.1 C5.1 C6.2 C7.2 J1.3 J1.5 J1.11 J1.21 J1.27 J1.33 J1.39 J1.45 J1.51 J1.57 J1.71 J1.73 J1.75 J2.2 J2.3 Q2.2 R1.2 R3.1 R9.2 R10.1 U1.10 U1.12 U1.13 U1.24 | length 1339.9
  L01-Top Layer w10: J1.75 68.9,106.3 ; J1.73 88.58,114.17 ; J1.71@106.3,50.2 J1.71 108.27,114.17 ; J1.57 246.06,101.92 248.03,103.89 v1(248.03,149.61) ; v1(273.5,476.55) 273.62,476.68 Q2.2 ; C5.1 v1(311.02,1417.32) ; J1.51 305.12,133.86 ; J1.45 364.17,131.89 v1(366.14,133.86) ; R1.2 v1(374.02,1314.96) ; v1(417.32,417.32) R3.1@452.76,417.32 ; J1.39 423.23,122.39 437.01,136.17 v1(437.01,137.8) ; J1.33 482.28,135.83 v1(484.25,137.8) ; v1(539.37,141.73) 541.34,139.76 J1.27 ; v1(598.43,141.73) 600.39,139.76 J1.21 ; R9.2 v1(696.85,1338.58) ; v1(692.91,173.23) 692.91,171.6 698.82,165.7 J1.11 ; R10.1 v1(748.03,1393.7) ; J1.5 757.87,107.79 759.84,109.76 v1(759.84,145.67) ; J1.3 777.56,129.92
  other v1: 287.4,149.61 25.18,165.24 50.36,165.35 771.15,175.94 26.87,198.08 59.06,198.08 772.39,201.47 61.1,235.04 834.65,240.16 799.65,244.08 46.1,265.04 76.1,265.04 832.06,279.53 61.1,295.04 787.4,308.46 818.08,311.05 46.1,325.04 76.1,325.04 783.46,354.33 61.1,355.04 46.1,385.04 76.1,385.04 783.46,397.64 61.1,415.04 46.1,445.04 76.1,445.04 779.53,460.63 61.1,475.04 779.53,496.06 46.1,505.04 76.1,505.04 61.1,535.04 740.16,535.43 46.1,565.04 76.1,565.04 796.1,565.04 740.16,582.68 61.1,595.04 46.1,625.04 76.1,625.04 796.1,625.04 740.16,629.92 153.58,630.7 61.1,655.04 46.1,685.04 76.1,685.04 796.1,685.04 61.1,715.04 46.1,745.04 76.1,745.04 818.9,759.84 61.1,775.04 46.1,805.04 76.1,805.04 61.1,835.04 811.02,846.46 46.1,865.04 76.1,865.04 61.1,895.04 46.1,925.04 76.1,925.04 807.09,940.94 61.1,955.04 46.1,985.04 76.1,985.04 61.1,1015.04 811.02,1019.68 46.1,1045.04 76.1,1045.04 106.1,1045.04 136.1,1045.04 166.1,1045.04 256.1,1045.04 286.1,1045.04 316.1,1045.04 346.1,1045.04 811.02,1055.12 61.1,1075.04 91.1,1075.04 121.1,1075.04 151.1,1075.04 181.1,1075.04 271.1,1075.04 301.1,1075.04 331.1,1075.04 361.1,1075.04 811.02,1086.61 46.1,1105.04 76.1,1105.04 106.1,1105.04 136.1,1105.04 166.1,1105.04 196.1,1105.04 226.1,1105.04 316.1,1105.04 346.1,1105.04 376.1,1105.04 61.1,1135.04 91.1,1135.04 121.1,1135.04 361.1,1135.04 46.1,1165.04 76.1,1165.04 106.1,1165.04 376.1,1165.04 61.1,1195.04 91.1,1195.04 121.1,1195.04 361.1,1195.04 46.1,1225.04 76.1,1225.04 106.1,1225.04 376.1,1225.04 220.47,1236.6 141.73,1239.38 170.9,1238.59 253.64,1238.59 61.1,1255.04 91.1,1255.04 121.1,1255.04 271.1,1255.04 301.1,1255.04 214.88,1260.22 152.17,1261.48 197.79,1282.68 46.1,1285.04 76.1,1285.04 106.1,1285.04 226.1,1285.04 256.1,1285.04 286.1,1285.04 316.1,1285.04 346.1,1285.04 138.09,1286.62 185.94,1307.31 124.31,1310.24 61.1,1315.04 91.1,1315.04 241.1,1315.04 271.1,1315.04 301.1,1315.04 331.1,1315.04 184.6,1331.63 126.58,1337.83 46.1,1345.04 76.1,1345.04 346.1,1345.04 376.1,1345.04 406.1,1345.04 183.67,1356.41 124.88,1366.14 61.1,1375.04 91.1,1375.04 182.15,1381.77 123.96,1390.5 46.1,1405.04 76.1,1405.04 121.69,1416.54 61.1,1435.04 91.1,1435.04 331.1,1435.04 361.1,1435.04 391.1,1435.04 421.1,1435.04 114.75,1440.16 165.2,1447.69 110.45,1464.23 46.1,1465.04 76.1,1465.04 196.1,1465.04 226.1,1465.04 256.1,1465.04 286.1,1465.04 316.1,1465.04 346.1,1465.04 376.1,1465.04 406.1,1465.04 436.1,1465.04 156.77,1471.74 96.55,1486.22 172.37,1493.97 61.1,1495.04 211.1,1495.04 241.1,1495.04 271.1,1495.04 301.1,1495.04 331.1,1495.04 361.1,1495.04 391.1,1495.04 421.1,1495.04 90.55,1510.83 256.1,1525.04 286.1,1525.04 316.1,1525.04 346.1,1525.04 376.1,1525.04 496.1,1525.04 526.1,1525.04 556.1,1525.04 586.1,1525.04 616.1,1525.04 646.1,1525.04 676.1,1525.04 706.1,1525.04 736.1,1525.04 766.1,1525.04 796.1,1525.04 826.1,1525.04 129.92,1549.12 161.42,1549.12 244.09,1551.18 35.43,1555.12 271.1,1555.04 301.1,1555.04 331.1,1555.04 541.1,1555.04 571.1,1555.04 601.1,1555.04 631.1,1555.04 661.1,1555.04 691.1,1555.04 721.1,1555.04 751.1,1555.04 781.1,1555.04 811.1,1555.04 841.1,1555.04 136.1,1585.04 256.1,1585.04 286.1,1585.04 316.1,1585.04 556.1,1585.04 586.1,1585.04 616.1,1585.04 646.1,1585.04 676.1,1585.04 706.1,1585.04 736.1,1585.04 766.1,1585.04 796.1,1585.04 826.1,1585.04 35.43,1606.3 121.1,1615.04 151.1,1615.04 271.1,1615.04 301.1,1615.04 571.1,1615.04 601.1,1615.04 631.1,1615.04 661.1,1615.04 691.1,1615.04 721.1,1615.04 751.1,1615.04 781.1,1615.04 811.1,1615.04 841.1,1615.04
  other v2: 433.07,1653.54
LNA_EN: R7.1 TP6.1 U1.14 | length 1294.6
  L01-Top Layer w10: v1@196.88,633.89 U1.14 ; R7.1 TP6.1 v1(712.6,1476.38)
  L04-Bottom Layer w10: v1(196.85,633.86) 196.85,846.46 401.57,1051.18 401.57,1283.46 511.81,1393.7 629.92,1393.7 v1(712.6,1476.38)
NetC5_2: C5.2 L1.1 R4.2 | length 114.7
  L01-Top Layer w7.5: L1.1@185.04,1417.32 C5.2 236.22,1359.08 cw(c229.5,1359.08) R4.2
NetJ1_35: J1.35 R14.1 | length 1050.2
  L01-Top Layer w7.5: R14.1 122.05,484.25 v1(157.48,448.82) ; J1.35 462.6,180.29 cw(c469.32,180.29) v1(464.57,185.04)
  L04-Bottom Layer w7.5: v1(157.48,448.82) cw(c166.98,448.82) 160.26,455.54 229.02,524.3 ; 229.03,524.31 cw(c255.91,497.41) 255.91,535.43 ccw(c255.91,625.67) 307.64,551.74 ccw(c255.91,625.67) 319.72,561.86 332.81,574.96 cw(c390.86,493.53) 390.86,593.53 470.67,593.53 cw(c470.67,548.94) 502.21,580.47 cw(c431.5,509.76) 531.5,509.76 531.5,252.53 cw(c463.61,252.53) 511.61,204.53 cw(c464.57,251.57) v1(464.57,185.04)
NetJ1_46: J1.46 R15.1 | length 537.1
  L01-Top Layer w7.5: R15.1 165.35,484.25 v1(196.85,452.76)
  L04-Bottom Layer w7.5: v1(196.85,452.76) 223.8,425.81 ccw(c273,475.02) 244.69,411.45 cw(c244.69,341.67) 273.38,405.28 cw(c244.69,341.67) 294.03,391.01 323.92,361.12 cw(c266.56,303.76) 347.68,303.76 347.68,112.98 ccw(c355.18,112.98) 349.43,108.16 cw(c337.03,95.76) 354.57,95.76 J1.46
NetJ1_50: J1.50 R13.2 | length 195
  L01-Top Layer w7.5: v1(314.96,192.91) R13.2
  L04-Bottom Layer w7.5: J1.50@315.08,60.16 v1@315.08,192.8
  L04-Bottom Layer w8: v1(314.96,192.91) v1@315.08,192.8 ; J1.50@315.08,60.16 J1.50
NetJ1_67: J1.67 R12.2 | length 205.5
  L01-Top Layer w7.5: J1.67 147.64,210.63 149.61,212.6 R12.2
NetLED1_1: LED1.1 R16.1 | length 42.3
  L01-Top Layer w7.5: LED1.1 336.7,544.88 R16.1
NetLED1_2: LED1.2 Q2.3 | length 103.5
  L01-Top Layer w7.5: Q2.3 248.03,591.41 250.67,594.05 279.78,594.05 290.21,604.49 LED1.2
NetLED2_2: LED2.2 R3.2 | length 73.5
  L01-Top Layer w7.5: R3.2@492.13,417.32 492.13,370.22 ccw(c525.73,370.22) LED2.2
NetQ1_1: Q1.1 R6.1 R7.2 R9.1 | length 261.2
  L01-Top Layer w10: Q1.1 536.81,1365.55 553.15,1381.89 R6.1 582.11,1381.89 582.11,1398.62 600.82,1417.32 627.95,1417.32 629.92,1415.35 R9.1
NetQ1_3: Q1.3 R4.1 | length 127.8
  L01-Top Layer w7.5: R4.1 322.83,1354.33 365.32,1396.82 396.82,1396.82 Q1.3
RF_ANT: C4.1 J2.1 L1.2 | length 146
  L01-Top Layer w7.5: J2.1 133.86,1464.85 ccw(c201.07,1464.85) 153.54,1417.32 C4.1
RF_MODULE: C4.2 U1.11 | length 161.2
  L01-Top Layer w7.5: C4.2 153.54,1324.75 ccw(c234.19,1324.75) 177.17,1267.72 cw(c129.56,1220.11) 196.88,1220.11 U1.11
RST_GPS: R12.1 R13.1 U1.8 | length 1336
  L01-Top Layer w10: R12.1 v1(149.61,330.71) ; v1(307.09,338.58) 314.96,330.71 R13.1 ; U1.8 v1(326.77,1248.03)
  L04-Bottom Layer w10: v1(307.09,338.58) 159.1,338.58 151.23,330.71 v1(149.61,330.71) 145.67,330.71 125.98,350.39 125.98,964.57 326.77,1165.35 v1(326.77,1248.03)
RX_GPS: R5.1 TP10.1 U1.21 | length 838.9
  L01-Top Layer w7.5: R5.1 259.84,362.2 283.46,385.83 324.74,385.83 449.01,261.56 493.84,261.56 543.31,311.02 543.31,574.36 570.87,601.92 TP10.1 570.87,696.88 U1.21
RX_GPS_CONN: J1.62 R5.2 | length 217.9
  L01-Top Layer w7.5: v1(220.47,177.17) 259.84,216.54 R5.2
  L04-Bottom Layer w7.5: J1.62 197.09,153.78 v1(220.47,177.17)
SAFEBOOT_N: TP7.1 U1.1 | length 88.3
  L01-Top Layer w10: U1.1 708.63,1185.04 TP7.1
SCL: J1.40 R2.1 U1.19 | length 716.2
  L01-Top Layer w7.5: U1.19 488.18,633.85 460.63,606.3 R2.1 v1(492.13,538.39)
  L04-Bottom Layer w7.5: J1.40 413.62,169.53 492.13,248.03 v1(492.13,538.39)
SCL: TP9.1
SDA: J1.42 R11.1 U1.18 | length 700.1
  L01-Top Layer w7.5: v1(370.08,538.39) R11.1 401.57,610.24 444.88,653.55 U1.18
  L04-Bottom Layer w7.5: v1(370.08,538.39) 370.08,275.59 393.94,251.73 J1.42
SDA: TP8.1
TP1: Q2.1 R14.2 R15.2 U1.3 | length 1298.5
  L01-Top Layer w7.5: v1(153.54,578.74) ccw(c153.54,550.23) 133.38,570.39 129.92,566.93 ccw(c148.93,547.92) 122.05,547.92 R14.2 R15.2 219.25,540.35 222.44,537.16 Q2.1
  L01-Top Layer w10: U1.3 618.08,1259.82 v1(625.98,1267.72)
  L04-Bottom Layer w7.5: v1(153.54,578.74) 186.93,578.74 ccw(c186.93,678.74) 257.64,608.03 415.59,765.99 ccw(c344.88,836.7) 442.17,813.58 ccw(c344.88,836.7) 444.88,836.7 444.88,1222.22 cw(c517.91,1222.22) 466.27,1273.86 cw(c536.98,1203.15) 536.98,1303.15 549.13,1303.15 cw(c549.13,1203.15) 619.84,1273.86 v1(625.98,1267.72)
TX_GPS: R8.1 TP11.1 U1.20 | length 683.2
  L01-Top Layer w7.5: R8.1 204.72,405.51 244.09,444.88 480.31,444.88 519.68,484.25 TP11.1 519.68,614.92 531.48,626.72 U1.20
TX_GPS_CONN: J1.64 R8.2 | length 203.4
  L01-Top Layer w7.5: v1(177.17,192.91) 204.72,220.47 R8.2
  L04-Bottom Layer w7.5: J1.64@177.28,60.16 v1@177.28,192.8
  L04-Bottom Layer w8: v1(177.17,192.91) v1@177.28,192.8 ; J1.64@177.28,60.16 J1.64
USB_DM: J1.9 U1.5 | length 1484.6
  L01-Top Layer w9.5: v1@518.08,1250.46 518.08,1222.5 520.48,1220.1 520.48,1192.09 U1.5 ; v1(712.72,251.97) 715.97,248.72 715.97,243.43 720.1,239.3 720.1,54.04 cw(c714.66,54.04) J1.9
  L04-Bottom Layer w9.5: v1(521.77,1255.91) ccw(c524.77,1252.9) 520.53,1252.9 520.53,1248.8 cw(c516.36,1248.8) 519.31,1245.85 ccw(c522.26,1242.9) 518.08,1242.9 518.08,1011.81 518.08,875.29 519.29,875.29 519.29,855.79 518.08,855.79 518.08,836.29 530.72,836.29 530.72,816.79 518.08,816.79 518.08,797.29 530.72,797.29 530.72,777.79 518.08,777.79 518.08,753.54 518.08,676.7 ccw(c617.64,676.7) 547.24,606.3 573.01,580.53 cw(c490.83,498.35) 607.05,498.35 607.05,303.15 ccw(c637.38,303.15) 615.93,281.7 667.42,230.22 ccw(c690.94,253.74) 690.94,220.47 699.16,220.47 ccw(c699.16,233.91) 708.66,224.41 ccw(c698.86,234.21) 712.72,234.21 v1(712.72,251.97)
USB_DP: J1.7 U1.6 | length 1483.9
  L01-Top Layer w9.5: U1.6 499.18,1192.09 499.18,1220.1 501.58,1222.5 v1@501.58,1250.46 ; v1(736.6,251.97) 736.6,54.04 ccw(c742.03,54.04) J1.7
  L04-Bottom Layer w9.5: v1(497.9,1255.91) cw(c494.89,1252.9) 499.14,1252.9 499.14,1248.8 ccw(c503.31,1248.8) 500.36,1245.85 cw(c497.41,1242.9) 501.58,1242.9 501.58,676.64 ccw(c617.49,676.64) 535.53,594.68 561.26,568.95 cw(c490.55,498.24) 590.55,498.24 590.55,303.04 ccw(c637.12,303.04) 604.19,270.11 665.5,208.81 ccw(c677.17,220.47) 677.17,203.97 699.2,203.97 ccw(c699.2,233.82) 720.3,212.71 720.38,212.8 ccw(c681.24,251.94) v1(736.6,251.97)
VDD_USB: R1.1 TP4.1 U1.7 | length 151.5
  L01-Top Layer w7.5: R1.1@421.26,1275.59 425.2,1279.53 TP4.1 464.57,1275.14 444.88,1255.46 U1.7
pads on no net: J1.1 J1.6 J1.8 J1.10 J1.20 J1.22 J1.23 J1.24 J1.25 J1.26 J1.28 J1.29 J1.30 J1.31 J1.32 J1.34 J1.36 J1.37 J1.38 J1.41 J1.43 J1.44 J1.47 J1.48 J1.49 J1.52 J1.53 J1.54 J1.55 J1.56 J1.58 J1.59 J1.60 J1.61 J1.63 J1.65 J1.66 J1.68 J1.69 U1.9 U1.15 U1.16 U1.17

## Polygon pours and split planes (outlines as drawn)
GND on L01-Top Layer "L01-Top Layer-GND" (solid, pour order 8): 161.82,1551.47 168.83,1546.78 173.51,1539.77 175.16,1531.5 175.16,1490.16 173.51,1481.89 168.83,1474.87 161.82,1470.19 159.53,1469.73 159.53,1464.85 159.53,1464.82 160.32,1456.74 162.69,1448.95 162.94,1448.48 169.69,1447.14 176.7,1442.45 181.39,1435.44 183.03,1427.17 183.03,1407.48 181.39,1399.21 179.22,1395.96 179.22,1394.39 183.36,1388.19 185,1379.92 185,1360.24 183.36,1351.96 178.67,1344.95 171.66,1340.27 163.39,1338.62 143.7,1338.62 135.43,1340.27 128.42,1344.95 123.73,1351.96 122.09,1360.24 122.09,1379.92 123.73,1388.19 127.87,1394.39 127.87,1395.96 125.7,1399.21 124.05,1407.48 124.05,1413.42 122.72,1415.04 116.13,1427.37 115.51,1429.41 114.51,1431.29 110.45,1444.66 110.24,1446.78 109.62,1448.82 108.25,1462.73 108.36,1463.79 108.15,1464.85 108.18,1465.02 108.18,1469.73 105.9,1470.19 98.89,1474.87 94.2,1481.89 92.56,1490.16 92.56,1531.5 94.2,1539.77 98.89,1546.78 105.9,1551.47 114.17,1553.11 153.54,1553.11
GND on L01-Top Layer "NONET_L-01_P-001" (solid, remove dead copper, pour order 7): 0,1653.54 866.14,1653.54 866.14,124.02 0,124.02
+3V3 on L01-Top Layer "NONET_L-01_P-001" (solid, remove dead copper, pour order 4): 673.23,691.69 673.23,525.59 649.61,525.59 649.61,322.83 566.93,322.83 566.93,543.31 602.33,543.31 602.33,691.69
GND on L01-Top Layer "NONET_L-01_P-001" (solid, remove dead copper, pour order 2): 748.27,122.05 748.27,192.91 799.21,192.91 799.21,122.05
GND on L01-Top Layer "NONET_L-01_P-001" (solid, remove dead copper, pour order 0): 59.06,98.43 122.05,98.43 122.05,200.79 11.81,200.79 11.81,149.61 59.06,149.61
+3V3 on L04-Bottom Layer "NONET_L-01_P-001" (solid, remove dead copper, pour order 3): 846.46,204.05 846.46,141.73 807.09,141.73 807.09,122.05 762.43,122.05 762.43,204.05
GND on L04-Bottom Layer "NONET_L-01_P-001" (solid, remove dead copper, pour order 9): 0,1653.54 0,135.4 866.14,135.4 866.14,1653.54 753.15,1653.54
+3V3 on L04-Bottom Layer "NONET_L-01_P-001" (solid, remove dead copper, pour order 1): 141.73,216.54 88.97,216.54 88.97,129.92 74.8,129.92 74.8,110.24 141.73,110.24 141.73,122.05
GND on L02-Inner Layer "NONET_L-01_P-001" (solid, remove dead copper, pour order 5): 0,1650.2 866.14,1650.2 866.14,117.95 0,117.95
+3V3 on L03-Inner Layer "NONET_L-01_P-001" (solid, remove dead copper, pour order 6): 846.46,1488.19 846.46,133.86 106.3,133.86 106.3,1019.68 464.57,1019.68 464.57,1488.19

## Keep-outs
Keep-Out Layer:
  lines w0.5: 2379.06,-1421.42 ccw(c2379.02,-1381.3) 2419.13,-1381.3

## Silkscreen, mask and mechanical layers (free items; w line width, h text height)
Top Overlay:
  lines w5: 299.21,456.69 299.21,472.44 ; 299.21,503.94 299.21,488.19 ; 299.21,488.19 314.96,472.44 283.46,472.44 299.21,488.19 ; 299.21,488.19 299.21,488.19
  text "M2 QUANTUM V1" at 838.58,500 h59.06 r90
  text "B Key" at 600.55,173.54 h30
Bottom Overlay:
M01_PCB_Outline:
  the board outline again, w4

## Dimensions
42.32,0 to 823.82,0 on M03_PCB_Dimensions
42.32,0 to 0,1653.54 on M03_PCB_Dimensions
0,124.02 to 866.14,124.02 on M03_PCB_Dimensions

## Text inside footprints (layer, text, board x,y; h text height)
J1: Top Overlay "1" at 791.57,108.27 h19.68 r270; Top Overlay "21" at 597.44,111.22 h19.68 r270; Top Overlay "11" at 688.98,109.25 h19.68 r270; Top Overlay "75" at 59.06,114.17 h19.68 r270; Bottom Overlay "2" at 788.69,118.11 h19.68 r270; Bottom Overlay "20" at 594.49,106.3 h19.68 r270; Bottom Overlay "10" at 696.85,110.24 h19.68 r270; Bottom Overlay "74" at 66.93,114.17 h19.68 r270